# Altium PCB AG1280.PcbDoc
Units mil, origin at the board's own origin, x right, y up, seen from the top; angles counter-clockwise.
Board outline 3640 x 2085 mil, 2 copper layers (Top Layer, Bottom Layer); 48 components, 49 nets, 202 pads, 44 vias.
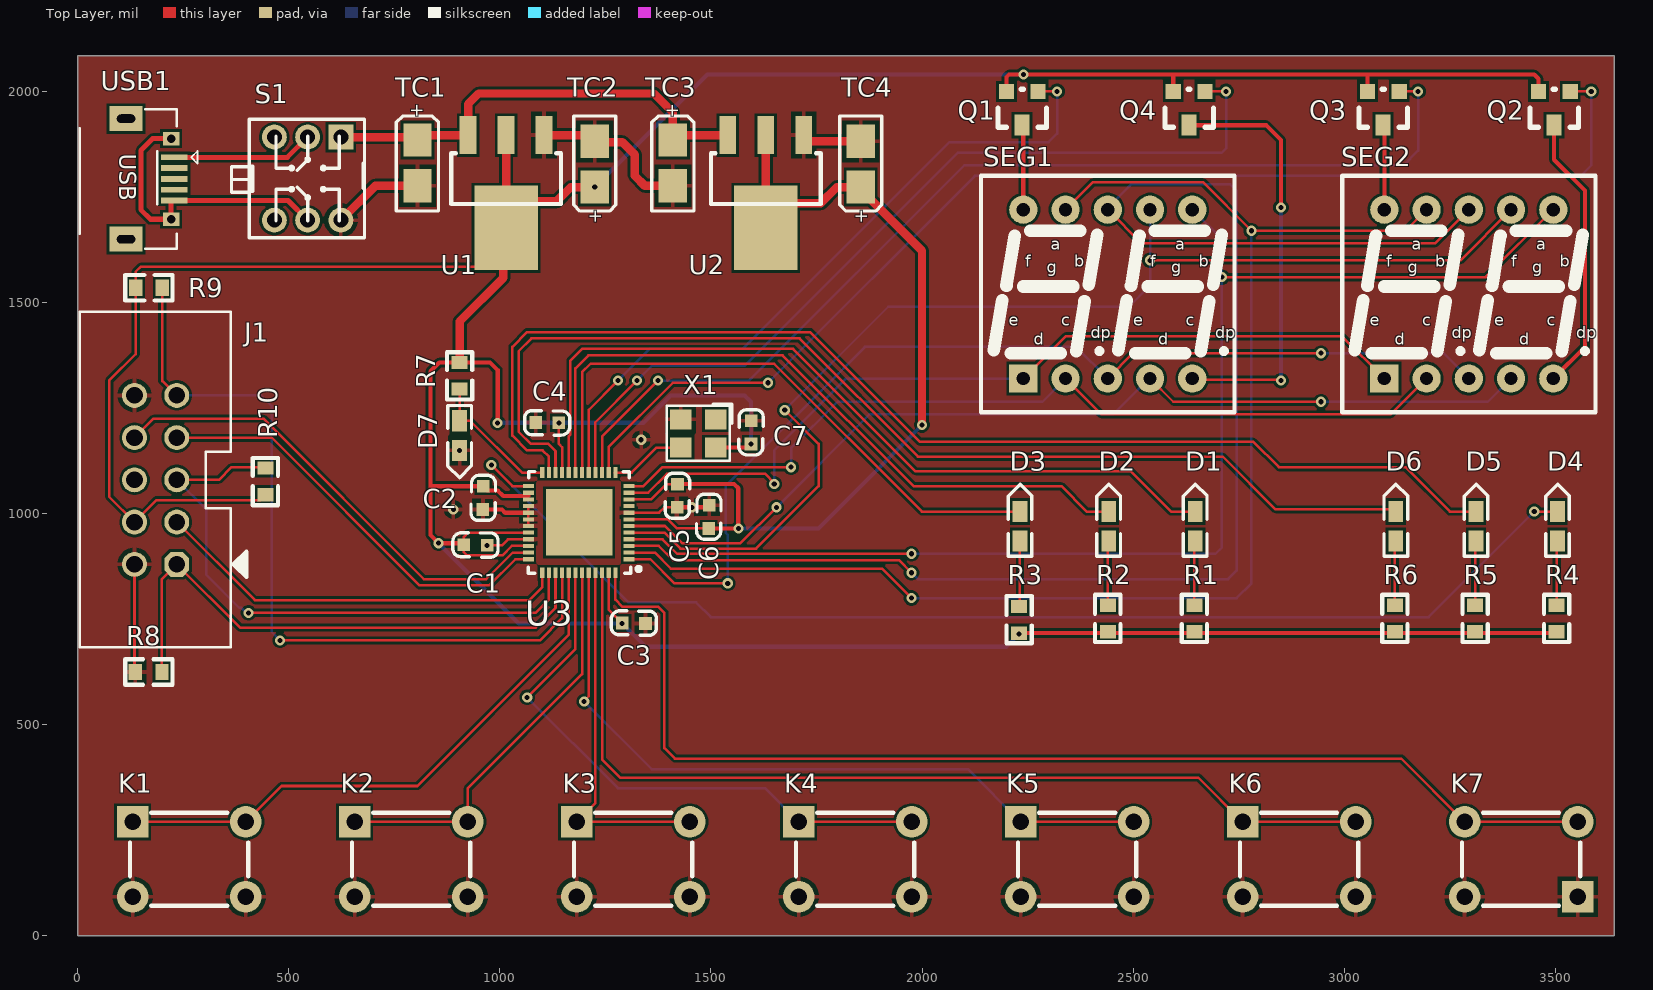
[diagram p0: Top Layer view]
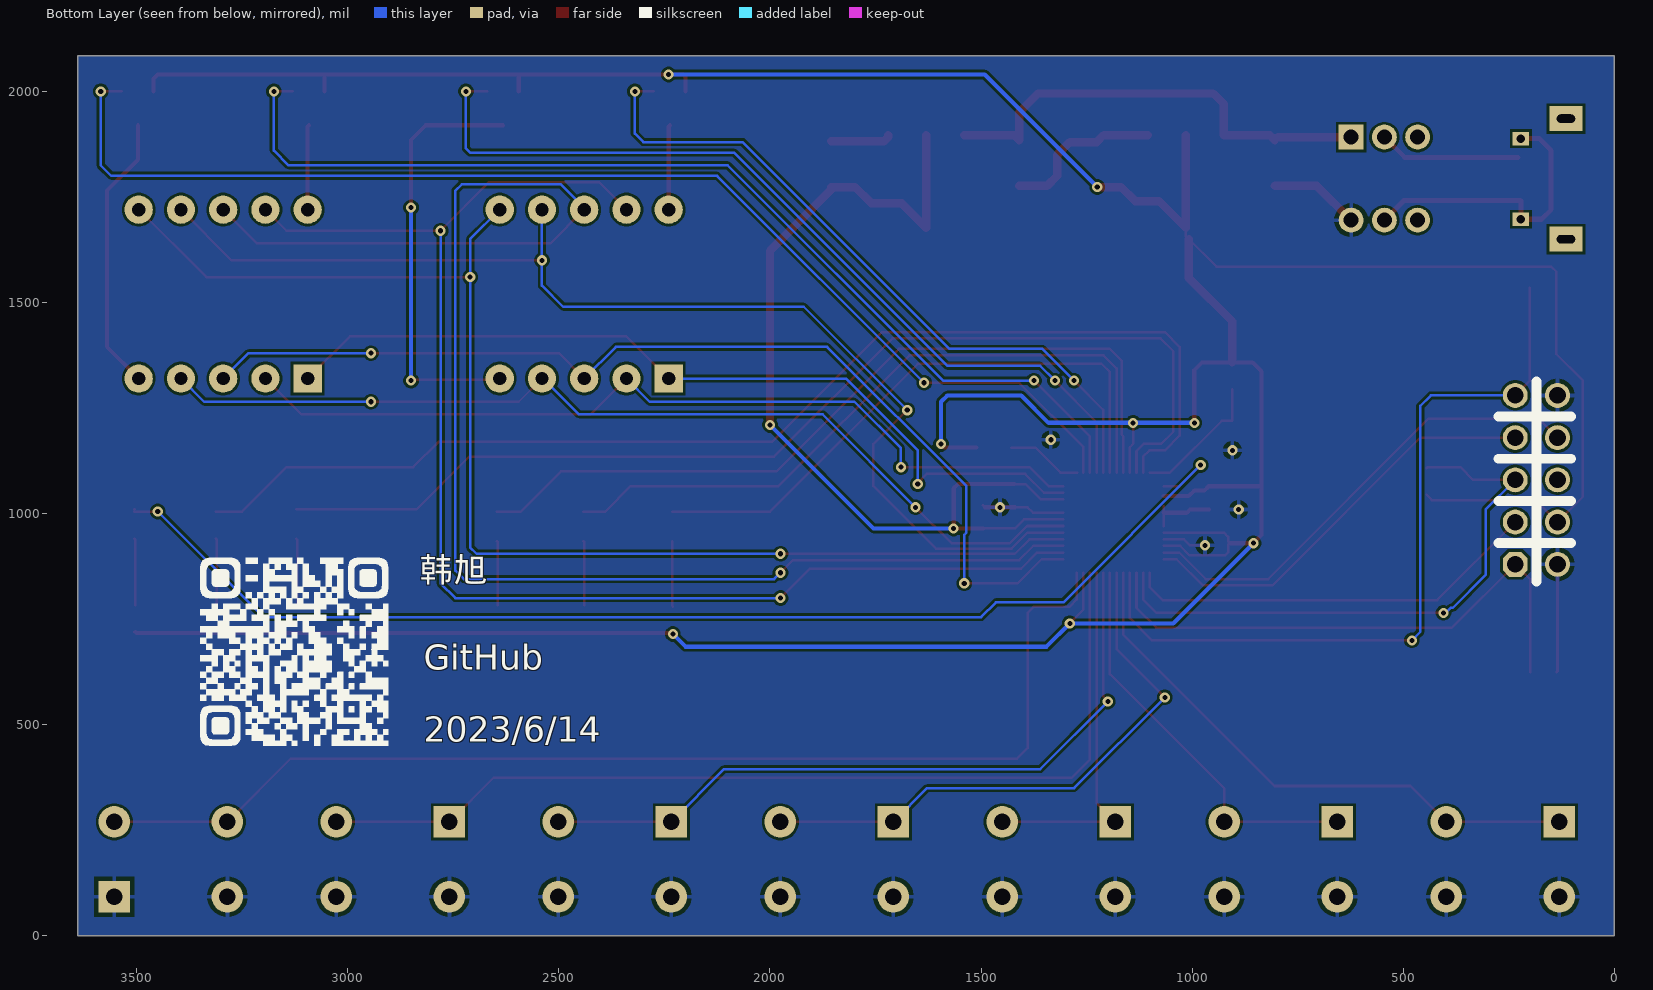
[diagram p1: Bottom Layer view, seen from below]
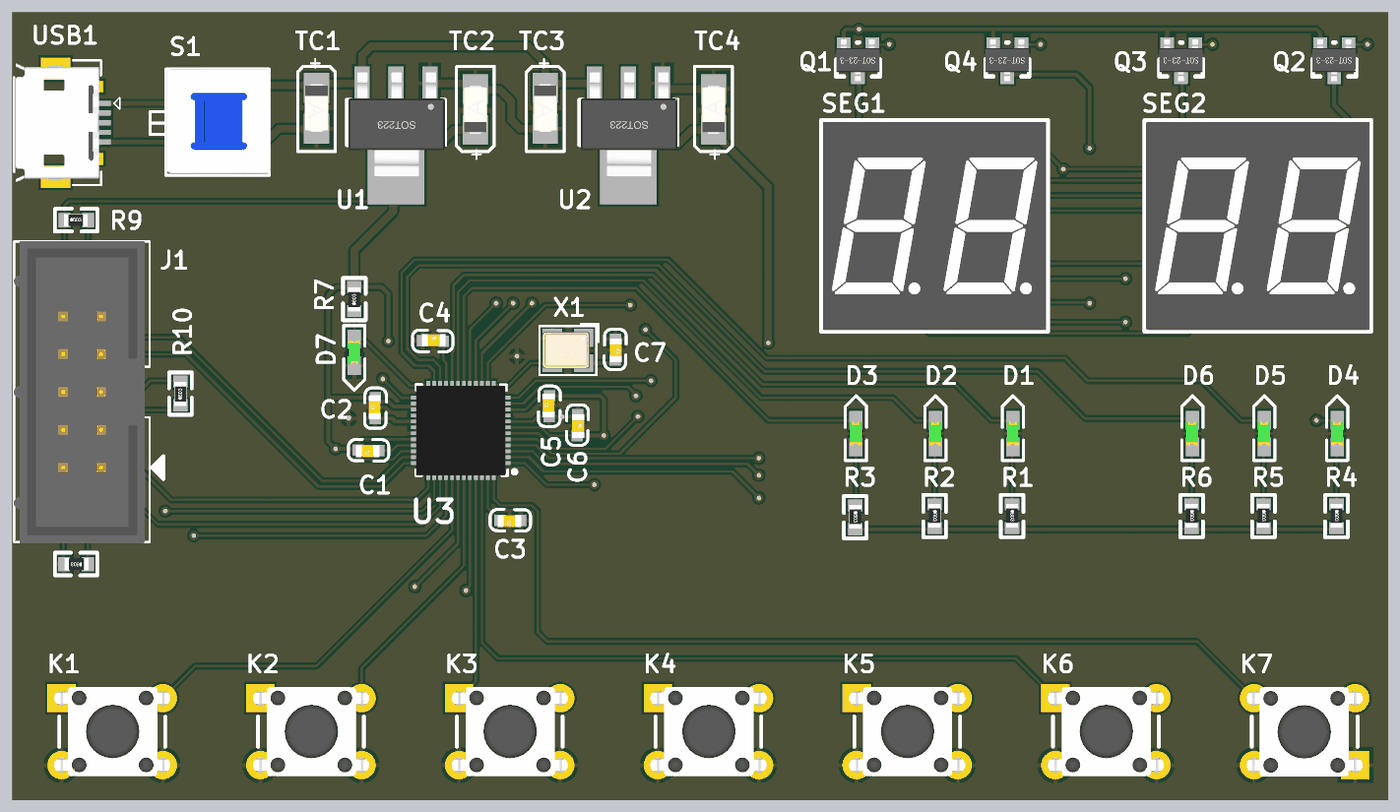
[diagram p2: 3D render of the assembled board from above, using the file's embedded part models]

## Layer stack, top to bottom
Top Solder: solder mask 0.4, Solder Resist, Dk 3.5
Top Layer: signal copper 1.4
Dielectric 1: dielectric 12.6, FR-4, Dk 4.8
Bottom Layer: signal copper 1.4
Bottom Solder: solder mask 0.4, Solder Resist, Dk 3.5

## Board outline
0,0 0,2085 3640,2085 3640,0

## Design rules (kind name [scope] priority, off if disabled: settings)
Clearance [All] p1: gap=6 ignorepadtopadclearanceinfootprint=TRUE except(0: Arc-Hole Track-Hole SMDPad-Hole THPad-Hole Via-Hole Fill-Hole Poly-Hole Region-Hole Text-Hole)
MinimumSolderMaskSliver [All] p1: minsoldermaskwidth=6
PolygonConnect [All] p1: connectstyle=Relief reliefconductorwidth=10 reliefentries=4 polygonreliefangle="90 Angle" airgapwidth=10
RoutingVias [All] p1: holewidth=12 width=24 viastyle="Through Hole" minholewidth=10 minwidth=18 maxholewidth=28 maxwidth=50
SilkToSilkClearance [All] p1: silktosilkclearance=6
SilkToSolderMaskClearance [IsPad] p1: minsilkscreentomaskgap=6 clearancetoexposedcopper=TRUE
SolderMaskExpansion [IsVia] p1: expansion=4 istentingtop=TRUE
Width [All] p1: maxlimit=50 minlimit=6 preferedwidth=10 minimp=50.000000 maximp=50.000000 favimp=50.000000
27 further rules are at their usual default settings.

## Components (designator, comment, footprint, x,y, rotation, side; value= is the part's Value field where it differs from the comment)
C1 "100n" 0603C 959.65,1009.79 r90 top
C2 "100n" 0603C 970.21,924.65 r180 top
C3 "100n" 0603C 1345.21,739.65 r180 top
C4 "100n" 0603C 1084.79,1216.35 r0 top
C5 "100n" 0603C 1419.65,1014.79 r90 top
C6 "100n" 0603C 1496.35,1020.21 r270 top
C7 "100n" 0603C 1596.35,1220.21 r270 top
D1 "LED" LED-0603B 2647.26,935 r90 top
D2 "LED" LED-0603B 2442.26,935 r90 top
D3 "LED" LED-0603B 2232.26,935 r90 top
D4 "LED" LED-0603B 3505.26,935 r90 top
D5 "LED" LED-0603B 3312.26,935 r90 top
D6 "LED" LED-0603B 3122.26,935 r90 top
D7 "LED" LED-0603B 904.74,1220 r270 top
J1 "IDC-10P" IDC2.54-10P 235,880 r90 top
K1 "KEY" DIP-6X6X6 130.62,270 r0 top
K2 "KEY" DIP-6X6X6 656.35,270 r0 top
K3 "KEY" DIP-6X6X6 1182.08,270 r0 top
K4 "KEY" DIP-6X6X6 1707.81,270 r0 top
K5 "KEY" DIP-6X6X6 2233.54,270 r0 top
K6 "KEY" DIP-6X6X6 2759.27,270 r0 top
K7 "KEY" DIP-6X6X6 3552.72,92.83 r180 top
Q1 "PNP" SOT-23 2240,1965 r180 top
Q2 "PNP" SOT-23 3500,1965 r180 top
Q3 "PNP" SOT-23 3095,1965 r180 top
Q4 "PNP" SOT-23 2635,1965 r180 top
R1 "330" 0603R 2645,782.99 r270 top
R2 "330" 0603R 2440,782.99 r270 top
R3 "330" 0603R 2230,780 r270 top
R4 "330" 0603R 3503,782.99 r270 top
R5 "330" 0603R 3310,782.99 r270 top
R6 "330" 0603R 3120,782.99 r270 top
R7 "330" 0603R 905,1295 r90 top
R8 "1K" 0603R 200,625 r180 top
R9 "10K" 0603R 138,1535 r0 top
R10 "10K" 0603R 445,1045 r90 top
S1 "KFT DIP-7X7" "KFT DIP-7X7" 623.74,1891.85 r270 top
SEG1 "0.36IN-2-A" 0.36IN-2P 2240,1320 r0 top
SEG2 "0.36IN-2-A" 0.36IN-2P 3095,1320 r0 top
TC1 "10u" TAJ-A/3216 805,1886.64 r270 top
TC2 "10u" TAJ-A/3216 1225,1771.64 r90 top
TC3 "10u" TAJ-A/3216 1410,1886.64 r270 top
TC4 "10u" TAJ-A/3216 1855,1771.64 r90 top
U1 "AMS1117" SOT223 1015,1896.57 r180 top
U2 "AMS1117" SOT223 1630,1896.57 r180 top
U3 "AG1280Q48" "QFN48 6X6" 1187.74,981.39 r180 top
USB1 "Micro-USB" USB-micro_B 229.17,1843.9 r270 top
X1 "XTAL-ACT-4P" "OSC 3225-4P" 1470,1190 r180 top

## Footprints (in the part's own frame and the unit in brackets; to place one, negate y for a bottom-side part, rotate by r counter-clockwise, add the part's x,y. Pads: shape width x height; smd on the part's side, far side on the other; paste and mask are expansions set on the pad)
0.36IN-2P [mm]
  rect 1.7x1.7 hole 0.8: 1(0,0)
  round 1.7 hole 0.8: 2(2.54,0) 3(5.08,0) 4(7.62,0) 5(10.16,0) 6(10.16,10.16) 7(7.62,10.16) 8(5.08,10.16) 9(2.54,10.16) 10(0,10.16)
  silkscreen extent -2.54,-2.03 12.7,12.19, body extent -2.42,-1.93 12.58,12.06, height 7.2
0603C [mil]
  rect 30x30 smd: 1(0.21,-0.35) 2(55.21,-1.35)
  silkscreen extent -26,-30 81,28, body extent -1,-15 62,17, height 12
0603R [mm]
  rect 0.8x0.965 smd: 1(0,0) 2(1.6,0)
  silkscreen extent -0.64,-0.76 2.21,0.76, body extent -0.04,-0.41 1.56,0.41, height 0.45
DIP-6X6X6 [mm]
  rect 1.9x1.9 hole 1: 1(0,0)
  round 1.9 hole 1: 2(0,-4.5) 3(6.8,-4.5) 4(6.8,0)
  silkscreen extent -0.16,-5.04 6.96,0.54, body extent -0.68,-5.24 7.53,0.76, height 5.95
IDC2.54-10P [mm]
  oct 1.5x1.5 hole 1: 1(0,0)
  round 1.5 hole 1: 2(0,2.54) 3(2.54,0) 4(2.54,2.54) 5(5.08,0) 6(5.08,2.54) 7(7.62,0) 8(7.62,2.54) 9(10.16,0) 10(10.16,2.54)
  silkscreen extent -5,-4.19 15.2,5.84, body extent -5.07,-2.98 15.23,5.87, height 9.13
"KFT DIP-7X7" [mm]
  rect 1.5x1.5 hole 0.9: 1(0,0)
  round 1.5 hole 0.9: 2(0,-2) 3(0,-4) 4(5,-4) 5(5,-2) 6(5,0)
  silkscreen extent -1.08,-6.58 6.06,1.42, body extent -1.09,-5.46 5.91,1.54, height 11.2
LED-0603B [mil]
  rect 50x35 smd: A(0,0.26) K(70,0.26)
  silkscreen extent -36,-28 135,28, body extent 4,-15 66,17, height 24
"OSC 3225-4P" [mm]
  rect 1.3x1.2 smd: 1(-1.05,-0.85) 2(1.05,-0.85) 3(1.05,0.85) 4(-1.05,0.85)
  silkscreen extent -2.03,-1.75 1.91,1.65, body extent -1.47,-1.27 1.73,1.23, height 0.7
"QFN48 6X6" [mm] "QFN, 48-Leads, Body 7.00x7.00mm, Pitch 0.50mm, Thermal Pad 5.73x5.73mm, IPC Medium Density"
  rect 0.65x0.25 smd: 1(-2.997,2.271) 2(-2.997,1.871) 3(-2.997,1.471) 4(-2.997,1.071) 5(-2.997,0.671) 6(-2.997,0.271) 7(-2.997,-0.129) 8(-2.997,-0.529) 9(-2.997,-0.929) 10(-2.997,-1.329) 11(-2.997,-1.729) 12(-2.997,-2.129) 25(3.048,-2.129) 26(3.048,-1.729) 27(3.048,-1.329) 28(3.048,-0.929) 29(3.048,-0.529) 30(3.048,-0.129) 31(3.048,0.271) 32(3.048,0.671) 33(3.048,1.071) 34(3.048,1.471) 35(3.048,1.871) 36(3.048,2.271)
  rect 0.25x0.65 smd: 13(-2.184,-2.941) 14(-1.784,-2.941) 15(-1.384,-2.941) 16(-0.984,-2.941) 17(-0.584,-2.941) 18(-0.184,-2.941) 19(0.216,-2.941) 20(0.616,-2.941) 21(1.016,-2.941) 22(1.416,-2.941) 23(1.816,-2.941) 24(2.216,-2.941) 37(2.216,3.083) 38(1.816,3.083) 39(1.416,3.083) 40(1.016,3.083) 41(0.616,3.083) 42(0.216,3.083) 43(-0.184,3.083) 44(-0.584,3.083) 45(-0.984,3.083) 46(-1.384,3.083) 47(-1.784,3.083) 48(-2.184,3.083)
  rect 4x4 smd: 49(0,0.055)
  silkscreen extent -3.71,-3.01 3.05,3.11, body extent -2.99,-2.93 3.05,3.11, height 0.85
SOT223 [mil]
  rect 40x90 smd: 1(-90,0) 2(0,0) 3(90,0)
  rect 150x200 smd: 2(0,220)
  silkscreen extent -130,43 130,163, body extent -130,-30 126,246, height 65
SOT-23 [mil]
  rect 36x36 smd: B(-35,-35) E(40,-35)
  rect 36x50 smd: C(3,45)
  silkscreen extent -55,-40 60,50, body extent -54,-48 60,62, height 47
TAJ-A/3216 [mm]
  rect 2x1.7 smd: 1(0.047,0) 2(2.794,0)
  silkscreen extent -1.4,-1.27 4.32,1.27, body extent -0.2,-0.8 3,0.8, height 1.6
USB-micro_B [mm]
  rect 1.5x2 hole 0.5 slot 1.1 at 90 deg: 0(-2.325,-2.9) 0(4.925,-2.9)
  rect 0.35x1.6 smd: 1(0,0) 2(0.65,0) 3(1.3,0) 4(1.95,0) 5(2.6,0)
  rect 0.8x1 hole 0.5: 5(-1.125,-0.19) 5(3.725,-0.19)
  silkscreen extent -2.89,-5.69 5.49,1.4, body extent -2.7,-5.6 5.3,0, height 2.8

## Part data
C1 C2 C3 C4 C5 C6 C7: library part CAP, "无极性电容"
Q1 Q2 Q3 Q4: "PNP三极管"
R1 R2 R3 R4 R5 R6 R7 R8 R9 R10: library part RES
SEG1 SEG2: "2位0.36寸共阳数码管"
TC1 TC2 TC3 TC4: library part TCAP, "钽电容"
U1 U2: "三端稳压芯片"
X1: "4脚有源晶振"

## Via types
v1: diameter 24, hole 12, Top Layer to Bottom Layer, tented both sides, 43 vias
v2: diameter 24, hole 12, Top Layer to Bottom Layer, 1 vias

## Nets (pads, with @x,y where several pads share a name; then routed paths per layer and width w, separated by ;. In a path a pad name is that pad's centre, name@x,y a point inside that pad or via, vN(x,y) a via of type N, cw(c..) or ccw(c..) an arc to the next point about the centre after c; other vN are vias at no path point)
1V2: C5.2 C6.2 TC4.1 U2.2 U3.7 U3.10 | length 2286.8
  Top Layer w6: U3.7 1398.54,986.46 1420,965 C6.2 ; U3.10 1358.7,1033.7 1395,1070 C5.2
  Top Layer w10: C5.2 1555,1070 1565,1060 v1(1565,965) C6.2
  Top Layer w20: U2.2@1630,1896.57 1630,1676.57 1688.43,1735 1760,1735 1798.49,1773.49 TC4.1 1855,1767.58 2000,1622.58 v1(2000,1210)
  Bottom Layer w10: v1(1565,965) 1755,965 v1(2000,1210)
3V3: C1.2 C2.2 C3.2 C4.2 C7.2 J1.4 Q1.E Q2.E Q3.E Q4.E R1.2 R2.2 R3.2 R4.2 R5.2 R6.2 R7.2 R9.1 R10.1 TC2.1 U1.2 U3.21 U3.26 U3.27 U3.32 U3.34 U3.47 X1.4 | length 10461.7
  Top Layer w6: R10.1 432.25,1032.25 187.25,1032.25 J1.4 75,1040 75,1315 138,1378 R9.1 138,1573 150,1585 943,1585 1008.29,1650.29 1015,1657 U1.2@1015,1676.57 ; C2.2@911,930 915,934 915,945 925,955 1015,955 1015.04,954.96 U3.32 ; C2.2 915,908.51 922.51,901 1006,901 1028.46,923.46 U3.34 ; C4.2@1140.79,1214.21 v1(1140,1215) 1140,1165 1147.76,1157.24 U3.21 ; U3.47 1257.99,773.01 C3.2 v1(1290,740)
  Top Layer w10: C2.2@911,930 v1(855,930) 835.78,949.22 835.78,1065 ; v1(995,1215) 995,1340 977.01,1357.99 R7.2 856.61,1357.99 835.78,1337.16 835.78,1065 ; 1067.74,1041.57 1008.43,1041.57 995,1055 971,1055 C1.2 835.78,1065 ; X1.4 1586.54,1156.54 v1(1595,1165) ; Q1.E 2200,2034.14 2205.86,2040 v2(2240,2040) 2595,2040 ; R3.2 3500.01,717.01 R4.2 ; Q4.E 2595,2040 ; Q3.E 3055,2040 ; Q2.E 3460,2030 3450,2040 3055,2040 ; 2595,2040 3055,2040
  Top Layer w20: R7.2 905,1455 1008.29,1558.29 U1.2@1008.29,1650.29 ; U1.2@1015,1896.57 1015,1676.57 1078.43,1740 1135,1740 1168.49,1773.49 v1(1225,1773.49)
  Bottom Layer w10: v1(855,930) 1045,740 v1(1290,740) 1345,685 2200,685 v1(2230,715) ; v1(995,1215) v1(1140,1215) 1340,1215 1405,1280 1580,1280 1595,1265 v1(1595,1165) ; v1(1225,1773.49) 1491.51,2040 v2(2240,2040)
+5: S1.1 TC1.1 TC3.1 U1.3 U2.3 | length 1096.6
  Top Layer w20: S1.1 797.94,1891.85 TC1.1 816.79,1896.57 U1.3 925,1970 950,1995 1365,1995 1410,1950 TC3.1 1421.79,1896.57 U2.3
GND: C1.1 C2.1 C3.1 C4.1 C5.1 C6.1 C7.1 D7.K J1.2 J1.10 K1.2 K1.3 K2.2 K2.3 K3.2 K3.3 K4.2 K4.3 K5.2 K5.3 K6.2 K6.3 K7.1 K7.4 R8.2 S1.6 TC1.2 TC2.2 TC3.2 TC4.2 U1.1 U2.1 U3.8 U3.28 U3.29 U3.30 U3.31 U3.33 X1.2 | length 1458.4
  Top Layer w6: J1.2 135,627.01 R8.2 ; v1(970,925) 1005,925 1019.21,939.21 U3.33 ; U3.31 U3.30 U3.29 U3.28 ; U3.8 1377.2,1002.2 1390,1015 C5.1 ; C6.1@1491,1015 C6.1
  Top Layer w10: C1.1 1005,1010 1012.8,1002.2 U3.29 ; C5.1 v1(1455.5,1015) C6.1@1491,1015
  Top Layer w20: S1.6 705.38,1776.64 TC1.2 ; U1.1 1210.06,1896.57 TC2.2 1226.64,1880 1290,1880 1320,1850 1320,1800 1343.36,1776.64 TC3.2 ; U2.1 1720,1891.64 1730,1881.64 TC4.2
  other v1: 890,1010 905,1150 1335,1175
NetD1_A: D1.A R1.1 | length 152.8
  Top Layer w6: R1.1 2645,933 D1.A
NetD1_K: D1.K U3.20 | length 1917.3
  Top Layer w6: U3.20 1163.5,1183.5 1167.25,1187.25 1167.25,1362.25 1195,1390 1695,1390 1985,1100 2495,1100 2590,1005 D1.K
NetD2_A: D2.A R2.1 | length 152.8
  Top Layer w6: R2.1 2440,933 D2.A
NetD2_K: D2.K U3.19 | length 1675.8
  Top Layer w6: U3.19 1179.25,1344.25 1210,1375 1670,1375 1980,1065 2330,1065 2390,1005 D2.K
NetD3_A: D3.A R3.1 | length 155.8
  Top Layer w6: R3.1 2232,782 D3.A
NetD3_K: D3.K U3.18 | length 1428.1
  Top Layer w6: U3.18 1195,1335 1215,1355 1650,1355 2000,1005 D3.K
NetD4_A: D4.A R4.1 | length 157.8
  Top Layer w6: R4.1 3503,938 D4.A@3505,940
NetD4_K: D4.K U3.25 | length 2886.1
  Top Layer w6: v1(980,1115) 1030,1065 U3.25@1067.74,1065 ; v1(3450,1005) D4.K
  Bottom Layer w6: v1(980,1115) 1305,790 1465,790 1500,755 3200,755 v1(3450,1005)
NetD5_A: D5.A R5.1 | length 157.8
  Top Layer w6: R5.1 3310,938 D5.A@3312,940
NetD5_K: D5.K U3.23 | length 2827.5
  Top Layer w6: U3.23 1116.26,1135.23 1101.49,1150 1065,1150 1030,1185 1030,1395 1065,1430 1735,1430 1995,1170 2785,1170 2845,1110 3145,1110 3250,1005 D5.K
NetD6_A: D6.A R6.1 | length 157.8
  Top Layer w6: R6.1 3120,938 D6.A@3122,940
NetD6_K: D6.K U3.22 | length 2605.4
  Top Layer w6: U3.22 1132.01,1147.99 1115,1165 1073.51,1165 1045,1193.51 1045,1385 1075,1415 1710,1415 1990,1135 2712.25,1135 2837.25,1010 D6.K@3122,1010
NetD7_A: D7.A R7.1 U3.24 | length 321.4
  Top Layer w6: R7.1 D7.A 930,1220 1052.83,1097.17 U3.24
NetJ1_1: J1.1 R8.1 U3.39 | length 1331.1
  Top Layer w6: R8.1 200,845 J1.1 385,730 1085,730 1132.01,777.01 U3.39
NetJ1_3: J1.3 U3.37 | length 989.3
  Top Layer w6: J1.3 420,795 1070,795 1100.51,825.51 U3.37
NetJ1_5: J1.5 R10.2 U3.38 | length 1402.5
  Top Layer w6: J1.5 335,1080 365,1110 442.99,1110 R10.2 ; v1(405,765) 1085,765 1116.26,796.26 U3.38
  Bottom Layer w6: J1.5 305,1010 305,855 383.03,776.97 388.16,776.97 400.13,765 v1(405,765)
NetJ1_7: J1.7 U3.36 | length 1003.4
  Top Layer w6: J1.7 460,1180 810,830 975,830 1036.97,891.97 U3.36
NetJ1_8: J1.8 U3.35 | length 1134.8
  Top Layer w6: J1.8 180,1225 440,1225 820,845 968.03,845 1030.75,907.72 U3.35
NetJ1_9: J1.9 R9.2 U3.40 | length 1864.6
  Top Layer w6: R9.2 200.99,1314.01 J1.9 ; v1(480,700) 1095,700 1147.76,752.76 U3.40
  Bottom Layer w6: J1.9 435,1280 460,1255 460,720 v1(480,700)
NetK1_1: K1.1 K1.4 U3.41 | length 1363.1
  Top Layer w6: K1.1 K1.4 483.33,355 805,355 1163.5,713.5 U3.41
NetK2_1: K2.1 K2.4 U3.43 | length 983
  Top Layer w6: K2.1@665.58,279.23 K2.1 K2.4 924.06,349.06 1195,620 U3.43
NetK3_1: K3.1 K3.4 U3.45 | length 876.1
  Top Layer w6: U3.45 1226.5,314.42 1216.48,304.4 K3.1 K3.4
NetK4_1: K4.1 K4.4 U3.42 | length 1375
  Top Layer w6: v1(1065,565) 1179.25,679.25 U3.42 ; K4.1 K4.4
  Bottom Layer w6: v1(1065,565) 1280,350 1627.81,350 K4.1
NetK5_1: K5.1 K5.4 U3.44 | length 1728.8
  Top Layer w6: v1(1200,555) 1200,556.77 1210.75,567.51 U3.44 ; K5.1 K5.4
  Bottom Layer w6: v1(1200,555) 1360,395 2108.54,395 K5.1
NetK6_1: K6.1 K6.4 U3.46 | length 2288.2
  Top Layer w6: U3.46 1242.24,417.76 1285,375 2654.27,375 K6.1 K6.4
NetK7_3: K7.2 K7.3 U3.48 | length 2748.2
  Top Layer w6: U3.48 1273.74,796.26 1290,780 1375,780 1390,765 1390,445 1415,420 3135,420 K7.3 K7.2
NetQ1_B: Q1.B U3.17 | length 1673.8
  Top Layer w6: U3.17 1210.75,1245.75 v1(1280,1315) ; Q1.B v1(2320,2000)
  Bottom Layer w6: v1(1280,1315) 1355,1390 1575,1390 2065,1880 2300,1880 2320,1900 v1(2320,2000)
NetQ1_C: Q1.C SEG1.10 | length 201.2
  Top Layer w10: Q1.C 2240,1917 SEG1.10
NetQ2_B: Q2.B U3.14 | length 2889.1
  Top Layer w6: U3.14 1257.99,1157.99 1410,1310 v1(1635,1310) ; Q2.B v1(3585,2000)
  Bottom Layer w6: v1(1635,1310) 2125,1800 3560,1800 3585,1825 v1(3585,2000)
NetQ2_C: Q2.C SEG2.5 | length 661.3
  Top Layer w10: SEG2.5 3570,1395 3570,1765 3497,1838 Q2.C
NetQ3_B: Q3.B U3.15 | length 2480
  Top Layer w6: U3.15 1242.24,1182.24 v1@1372.5,1312.5 ; Q3.B v1(3175,2000)
  Bottom Layer w6: v1(1375,1315) 1590,1315 2100,1825 3140,1825 3175,1860 v1(3175,2000)
NetQ3_C: Q3.C SEG2.10 | length 201.2
  Top Layer w10: Q3.C 3095,1917 SEG2.10
NetQ4_B: Q4.B U3.16 | length 2066.4
  Top Layer w6: U3.16 1226.5,1216.5 v1(1325,1315) ; Q4.B v1(2720,2000)
  Bottom Layer w6: v1(1325,1315) 1360,1350 1580,1350 2085,1855 2710,1855 2720,1865 v1(2720,2000)
NetQ4_C: Q4.C SEG1.5 | length 1018.1
  Top Layer w6: SEG1.5@2642.5,1322.5 SEG1.5 2642.5,1317.5 2847.5,1317.5 v1(2850,1315)
  Top Layer w10: Q4.C 2815,1920 2850,1885 v1(2850,1725)
  Bottom Layer w10: v1(2850,1315) v1(2850,1725)
NetS1_2: S1.2 USB1.1 | length 335.7
  Top Layer w12: USB1.1 497.05,1843.9 S1.2
NetS1_5: S1.5 USB1.5 | length 699.3
  Top Layer w12: USB1.5@221.69,1888.19 178.19,1888.19 150,1860 150,1720 172.76,1697.24 221.69,1697.24 221.69,1740.65 222.58,1741.54 229.17,1741.54 498.46,1741.54 S1.5 ; S1.5@545,1706.57 S1.5@545,1715
NetSEG1_1: SEG1.1 SEG2.1 U3.11 | length 2052.7
  Top Layer w6: U3.11 1351.42,1049.45 1395.97,1094 1629,1094 1650,1073 v1(1650,1070) ; SEG1.1 2340,1420 2995,1420 SEG2.1
  Bottom Layer w6: v1(1650,1070) 1650,1150 1820,1320 SEG1.1
NetSEG1_2: SEG1.2 SEG2.2 U3.12 | length 2091.6
  Top Layer w6: U3.12 1340.2,1065.2 1385,1110 v1(1690,1110) ; SEG1.2 2425,1235 3110,1235 SEG2.2
  Bottom Layer w6: v1(1690,1110) 1690,1155 1800,1265 2285,1265 SEG1.2
NetSEG1_3: SEG1.3 SEG2.3 U3.1 | length 2467.4
  Top Layer w6: U3.1 1356.77,891.97 1413.74,835 v1(1540,835) ; SEG1.3 2500,1380 v1(2945,1380)
  Bottom Layer w6: v1(1540,835) 1540,949.94 1535,954.94 1535,1065 1865,1395 2365,1395 SEG1.3 ; v1(2945,1380) 3235,1380 SEG2.3
NetSEG1_4: SEG1.4 SEG2.4 U3.6 | length 2313.2
  Top Layer w6: U3.6 1391.26,970.71 1431.97,930 1570,930 v1(1655,1015) ; SEG1.4 2595,1265 v1(2945,1265)
  Bottom Layer w6: v1(1655,1015) 1875,1235 2452.1,1235 2537.1,1320 SEG1.4 ; v1(2945,1265) 3340,1265 SEG2.4
NetSEG1_6: SEG1.6 SEG2.6 U3.4 | length 3104.9
  Top Layer w6: U3.4 1385.79,939.21 1420,905 v1(1975,905) ; v1(2710,1560) 3335,1560 SEG2.6
  Bottom Layer w6: v1(1975,905) 2695,905 2710,920 2710,1650 SEG1.6
NetSEG1_7: SEG1.7 SEG2.7 U3.5 | length 2811.3
  Top Layer w6: U3.5 1390.04,954.96 1428,917 1607,917 1755,1065 1755,1165 v1(1675,1245) ; v1(2540,1600) 3275,1600 SEG2.7
  Bottom Layer w6: v1(1675,1245) 1920,1490 2490,1490 2540,1540 v1(2540,1600) SEG1.7
NetSEG1_8: SEG1.8 SEG2.8 U3.3 | length 3640.3
  Top Layer w6: U3.3 1376.54,923.46 1410,890 1945,890 v1(1975,860) ; SEG1.8 2520,1640 3215,1640 SEG2.8
  Bottom Layer w6: v1(1975,860) 1990,845 2725,845 2745,865 2745,1765 2730,1780 2495,1780 2440,1725 SEG1.8
NetSEG1_9: SEG1.9 SEG2.9 U3.2 | length 3318.6
  Top Layer w6: U3.2 1367.28,907.72 1405,870 1905,870 v1(1975,800) ; SEG1.9 2405,1785 2665,1785 v1(2780,1670) 3145,1670 SEG2.9
  Bottom Layer w6: v1(1975,800) 2745,800 2780,835 v1(2780,1670)
NetU3_13: U3.13 X1.3 | length 181.3
  Top Layer w6: U3.13@1271.91,1097.17 1312.17,1097.17 1371.54,1156.54 X1.3
pads on no net: J1.6 S1.3 S1.4 U3.9 U3.49 USB1.0 USB1.2 USB1.3 USB1.4 X1.1

## Polygon pours and split planes (outlines as drawn)
GND on Top Layer "NONET_L01_P-001" (solid, pour order 0): 0,2085 3640,2085 3640,0 0,0
GND on Bottom Layer "NONET_L01_P-001" (solid, pour order 1): 0,2085 3640,2085 3640,0 0,0

## Silkscreen, mask and mechanical layers (free items; w line width, h text height)
Bottom Overlay:
  drawing of 3775 lines, arcs and shapes, not listed
  text "韩旭" at 2829.95,818.75 h100
  text "GitHub" at 2820,630 h60
  text "2023/6/14" at 2820,460 h60
Mechanical 13:
  the board outline again, w10
Drill Drawing:
  text ".legend" at 3795,1914.99 h60

## Text inside footprints (layer, text, board x,y; h text height)
SEG1: Top Overlay "c" at 2330,1445 h27.56; Top Overlay "dp" at 2400,1415 h27.56; Top Overlay "e" at 2205,1445 h27.56; Top Overlay "d" at 2265,1400 h27.56; Top Overlay "a" at 2305,1625 h27.56; Top Overlay "g" at 2295,1570 h27.56; Top Overlay "b" at 2360,1585 h27.56; Top Overlay "f" at 2245,1585 h27.56; Top Overlay "f" at 2540,1585 h27.56; Top Overlay "b" at 2655,1585 h27.56; Top Overlay "g" at 2590,1570 h27.56; Top Overlay "a" at 2600,1625 h27.56; Top Overlay "d" at 2560,1400 h27.56; Top Overlay "e" at 2500,1445 h27.56; Top Overlay "dp" at 2695,1415 h27.56; Top Overlay "c" at 2625,1445 h27.56
SEG2: Top Overlay "c" at 3185,1445 h27.56; Top Overlay "dp" at 3255,1415 h27.56; Top Overlay "e" at 3060,1445 h27.56; Top Overlay "d" at 3120,1400 h27.56; Top Overlay "a" at 3160,1625 h27.56; Top Overlay "g" at 3150,1570 h27.56; Top Overlay "b" at 3215,1585 h27.56; Top Overlay "f" at 3100,1585 h27.56; Top Overlay "f" at 3395,1585 h27.56; Top Overlay "b" at 3510,1585 h27.56; Top Overlay "g" at 3445,1570 h27.56; Top Overlay "a" at 3455,1625 h27.56; Top Overlay "d" at 3415,1400 h27.56; Top Overlay "e" at 3355,1445 h27.56; Top Overlay "dp" at 3550,1415 h27.56; Top Overlay "c" at 3480,1445 h27.56
TC1: Top Overlay "+" at 790,1971.64 h30 r270
TC2: Top Overlay "+" at 1240,1686.64 h30 r90
TC3: Top Overlay "+" at 1395,1971.64 h30 r270
TC4: Top Overlay "+" at 1870,1686.64 h30 r90
USB1: Top Overlay "USB" at 99.17,1852.72 h40 r270